# Altium PCB ZD-STM32-ZOUYU.PcbDoc (part 6 of 8)
Units mm, origin at the board's own origin, x right, y up, seen from the top; angles counter-clockwise.
Board outline 251.84 x 139.06 mm, 2 copper layers (Top Layer, Bottom Layer); 254 components, 246 nets, 1172 pads, 599 vias.
Unrouted connection lines stored in the file: 9.
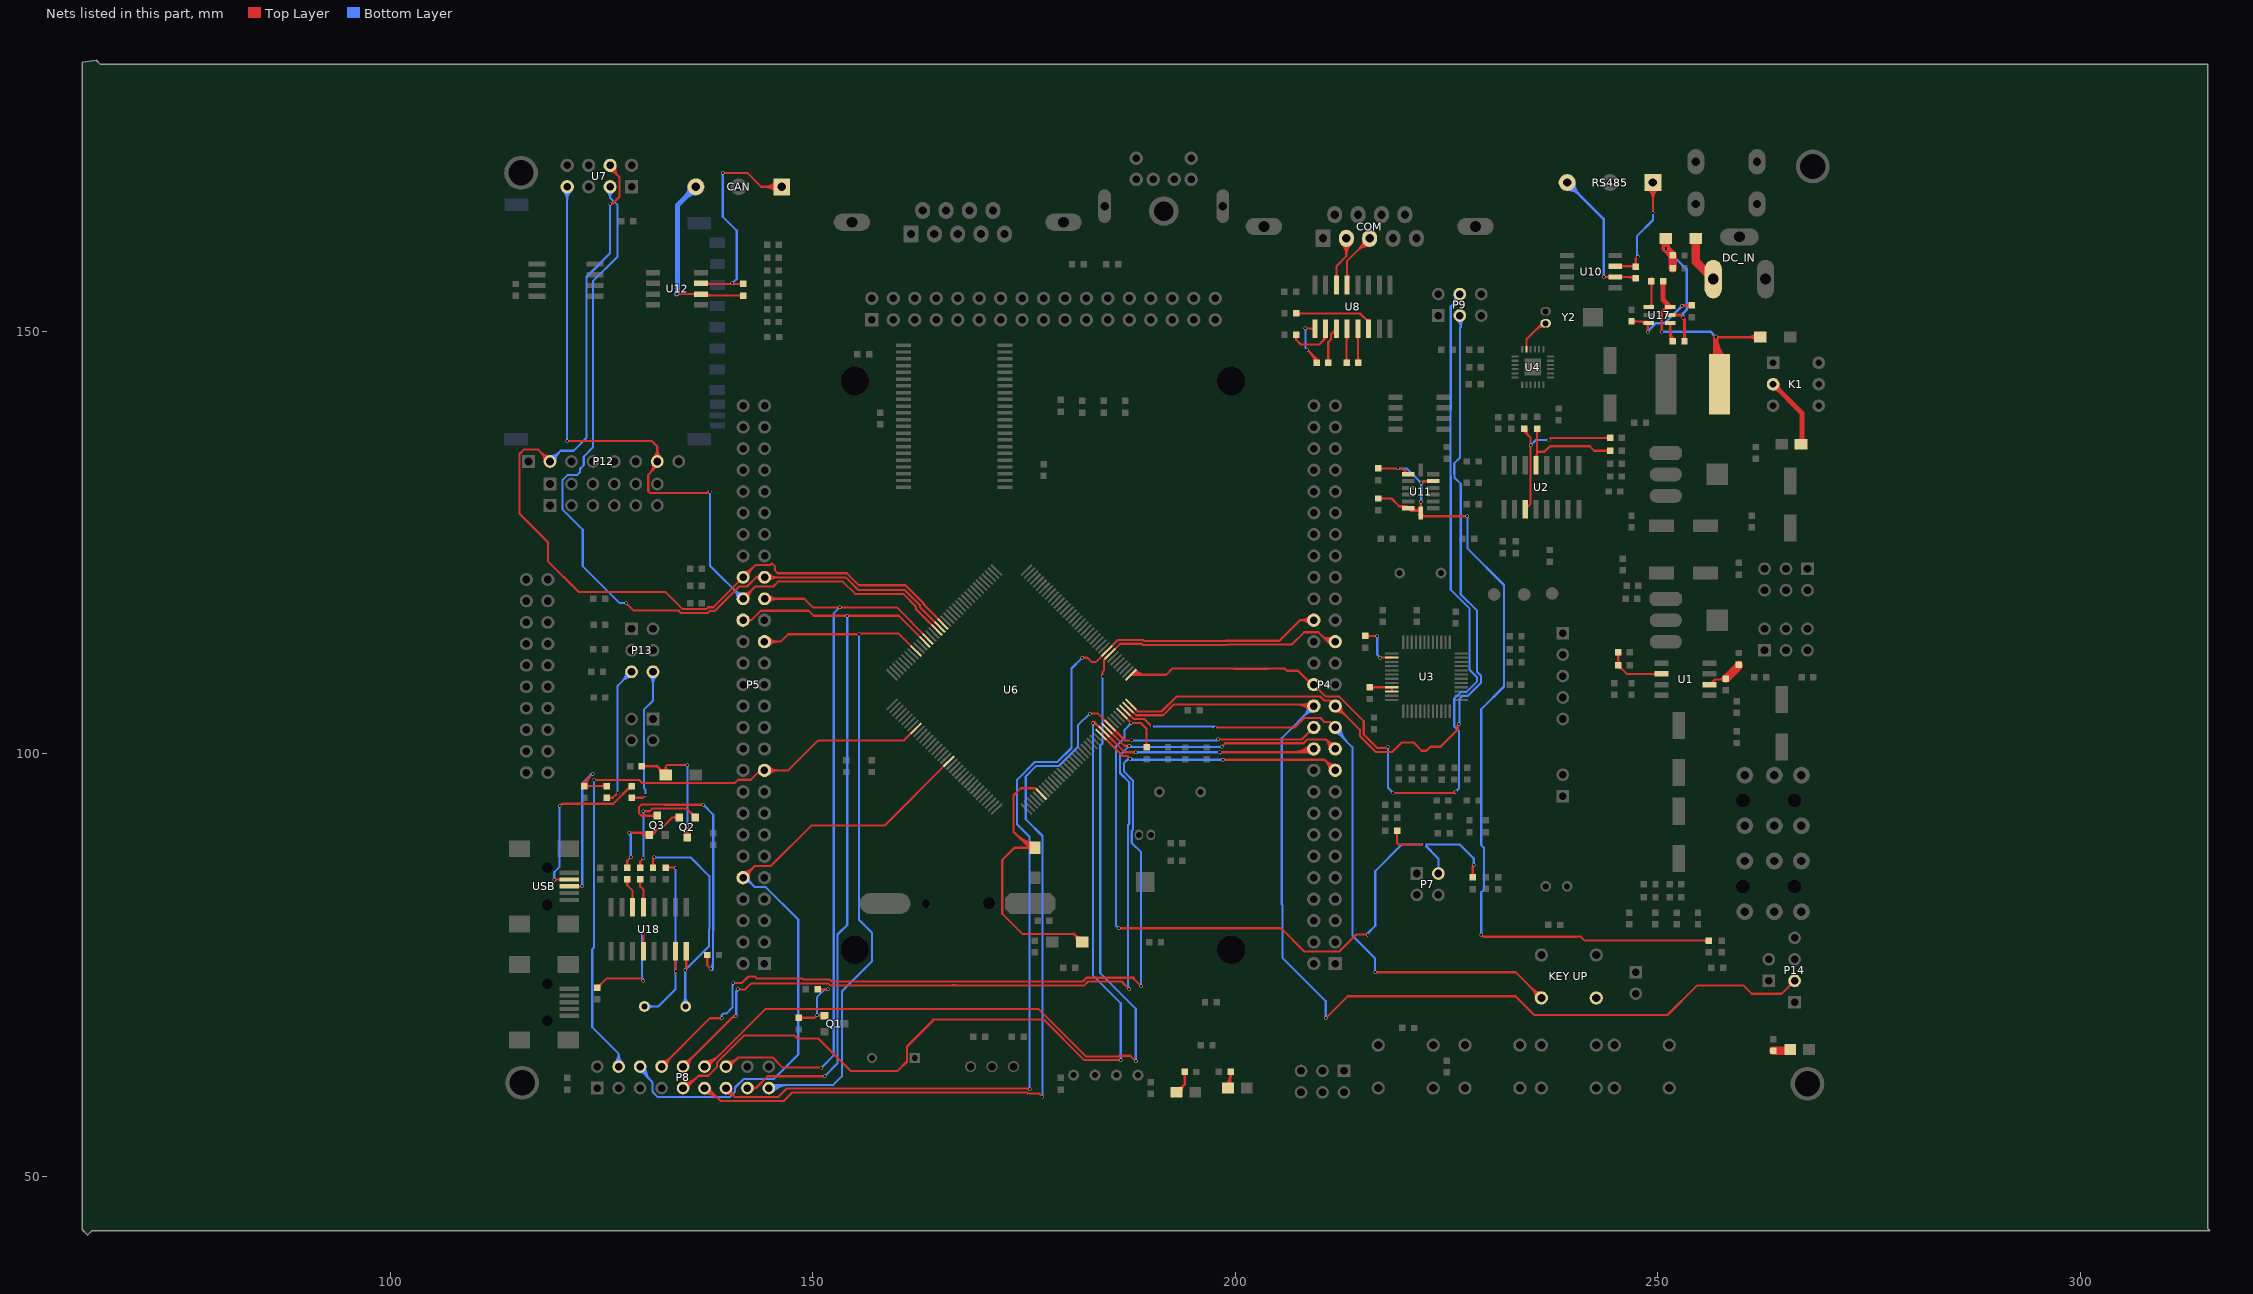
[diagram p6: the nets of this part, all layers, seen from the top]

## Via types
v1: diameter 0.4, hole 0.3, Top Layer to Bottom Layer, 598 vias
v2: diameter 0.3, hole 0.2, Top Layer to Bottom Layer, 1 vias

## Nets (pads, with @x,y where several pads share a name; then routed paths per layer and width w, separated by ;. In a path a pad name is that pad's centre, name@x,y a point inside that pad or via, vN(x,y) a via of type N, cw(c..) or ccw(c..) an arc to the next point about the centre after c; other vN are vias at no path point) (continued)
NetC49_2: C49.2 C50.2 P7.2 R33.1 U6.33 | length 99
  Top Layer w0.254: v1(186.182,79.375) 205.416,79.375 208.171,76.62 212.287,76.62 214.279,78.613 v1(215.646,78.613) ; U6.33@186.58,104.714 U6.33@186.58,104.779 v1(187.692,103.667) 188.814,103.667 189.486,102.995 C50.2@189.486,100.774 ; C50.2@189.306,100.954 ccw(c188.872,101.388) 189.486,101.388 ccw(c190.099,101.388) C50.2@189.665,100.954 ; C49.2@218.959,90.751 cw(c218.525,90.317) 219.138,90.317 cw(c219.752,90.317) C49.2@219.318,90.751 ; C49.2@219.138,90.93 219.138,89.471 219.329,89.281 v1(222.377,89.281) ; R33.1@227.912,85.574 ccw(c227.479,86.008) 228.092,86.008 ccw(c228.705,86.008) R33.1@228.272,85.574 ; R33.1@228.092,85.395 228.092,86.741 v1(228.219,86.868) ; 228.092,86.385 cw(c228.702,86.385) v1@228.271,86.816
  Bottom Layer w0.254: v1(186.182,79.375) 185.89,79.667 185.89,100.92 186.89,101.92 186.89,102.865 v1(187.692,103.667) ; v1(215.646,78.613) 215.646,78.74 216.554,79.648 216.554,86.125 219.71,89.281 v1(222.377,89.281) ; v1@215.719,78.613 cw(c216.202,78.613) 215.86,78.954 ; P7.2@224.028,85.852 224.028,87.63 v1(222.377,89.281) ; v1(228.219,86.868) 228.219,87.63 226.568,89.281 v1(222.377,89.281)
NetC65_1: C65.1 U8.3 | length 6.2
  Top Layer w0.254: C65.1@210.818,146.484 ccw(c210.385,146.917) 210.998,146.917 ccw(c211.611,146.917) C65.1@211.177,146.484 ; C65.1@210.998,146.304 210.998,148.75 211.32,149.073 211.32,149.665 U8.3@211.963,150.308 ; 211.362,149.707 cw(c211.804,149.265) U8.3@212.146,149.788
NetC65_2: C65.2 U8.1 | length 9
  Top Layer w0.254: v1(208.28,150.368) 209.363,150.368 U8.1@209.423,150.308 ; v1(208.534,147.828) 209.613,146.749 ; 208.861,150.368 cw(c208.861,149.746) U8.1@209.301,150.186 ; 208.867,147.495 cw(c207.677,146.306) C65.2@209.359,146.306 ; 209.3,147.062 cw(c208.544,146.306) C65.2@209.613,146.306 209.613,146.749 ; C65.2@209.485,146.525 ccw(c209.354,146.748) 209.613,146.748 ; C65.2@209.742,146.525 cw(c209.873,146.748) 209.613,146.748
  Bottom Layer w0.254: v1(208.28,150.368) 208.28,148.082 v1(208.534,147.828)
NetC66_2: C66.2 U8.2 | length 7.8
  Top Layer w0.254: C66.2@207.031,149.415 cw(c206.688,149.035) 207.201,149.035 ; C66.2@207.201,149.604 207.201,149.034 ; C66.2@207.37,149.415 ccw(c207.713,149.035) 207.201,149.035 ; 210.198,148.73 ccw(c209.419,149.508) U8.2@210.52,149.508 ; 210.631,149.163 ccw(c210.286,149.508) U8.2@210.774,149.508 ; U8.2@210.693,150.308 210.693,149.225 209.931,148.463 207.772,148.463 207.201,149.034
NetC67_1: C67.1 U8.5 | length 5.6
  Top Layer w0.254: C67.1@214.374,146.484 ccw(c214.063,146.795) 214.503,146.795 ; U8.5@214.381,149.386 cw(c214.085,149.09) 214.503,149.09 cw(c214.921,149.09) U8.5@214.625,149.386 ; 214.503,147.04 ccw(c215.29,147.04) C67.1@214.733,146.484 ; U8.5@214.503,150.308 214.503,146.355 C67.1@214.554,146.304
NetC67_2: C67.2 U8.4 | length 5.5
  Top Layer w0.254: C67.2@212.99,146.485 ccw(c212.556,146.919) 213.169,146.919 ccw(c213.783,146.919) C67.2@213.349,146.485 ; C67.2@213.169,146.306 213.169,150.245 U8.4@213.233,150.308 ; 213.169,148.937 cw(c213.804,148.937) U8.4@213.355,149.386
NetC69_2: C69.2 U8.6 | length 11.4
  Top Layer w0.254: C69.2@207.201,152.144 214.755,152.144 215.773,151.127 U8.6@215.773,150.308 ; C69.2@207.38,151.965 cw(c207.814,151.531) 207.814,152.144 cw(c207.814,152.758) C69.2@207.38,152.324 ; 215.464,151.435 cw(c215.137,151.108) U8.6@215.6,151.108 ; U8.6@215.51,151.39 ccw(c215.773,151.653) U8.6@215.773,151.281
NetC74_2: C74.2 C75.2 R47.1 U11.1 U11.6 U11.7 U11.12 | length 114.5
  Top Layer w0.254: C75.2@216.918,130.238 218.475,130.238 219.395,129.319 ; C74.2@216.918,133.794 v1(219.202,133.794) 219.773,133.794 U11.1@220.472,133.096 ; C75.2@217.097,130.059 cw(c217.531,129.625) 217.531,130.238 cw(c217.531,130.852) C75.2@217.097,130.418 ; C74.2@217.097,133.615 cw(c217.531,133.181) 217.531,133.794 cw(c217.531,134.408) C74.2@217.097,133.974 ; U11.6@219.819,129.319 cw(c219.819,129.014) U11.6@220.088,129.158 ; U11.6@219.864,129.038 ccw(c219.395,128.788) 219.395,129.319 ; 219.896,133.672 cw(c219.386,133.163) U11.1@220.102,133.081 ; U11.6@220.242,129.319 cw(c220.242,129.24) U11.6@220.312,129.277 ; U11.1@220.268,133.3 cw(c220.055,133.087) U11.1@220.355,133.052 ; U11.6@220.629,128.921 ccw(c220.863,129.04) 220.863,128.778 ; U11.6@220.855,129.037 ccw(c221.277,129.251) 221.277,128.778 ; 221.054,128.778 ccw(c221.054,129.915) 221.858,129.111 ccw(c221.648,129.321) 221.945,129.321 ccw(c222.242,129.321) U11.7@222.032,129.111 ; U11.6@221.082,129.152 ccw(c221.691,129.462) 221.691,128.778 ; 221.668,128.778 ccw(c221.668,129.302) U11.7@222.038,128.931 ; U11.7@221.708,128.327 cw(c221.923,128.052) U11.7@222.17,128.299 ; U11.7@221.865,128.127 cw(c222.101,127.824) 222.373,128.096 ; v1(221.945,129.87) U11.7@221.945,128.524 ; v1(221.996,132.08) 222.212,132.296 U11.12@223.426,132.296 ; v1@222.048,132.028 cw(c222.694,131.382) U11.12@222.694,132.296 ; U11.12@222.839,132.209 ccw(c222.629,131.999) 222.629,132.296 ccw(c222.629,132.593) U11.12@222.839,132.383 ; v1(227.457,128.143) 222.326,128.143 U11.7@221.945,128.524 ; v1(229.108,78.613) 229.362,78.359 240.428,78.359 240.447,78.378 240.883,78.378 241.359,77.902 R47.1@256.032,77.902 ; R47.1@255.852,77.722 ccw(c255.419,77.289) 255.419,77.902 ccw(c255.419,78.515) R47.1@255.852,78.081 ; 219.395,129.319 220.249,129.319 U11.6@220.472,129.096 220.79,128.778 221.691,128.778 ; 221.691,128.778 U11.7@221.945,128.524
  Bottom Layer w0.254: v1(219.202,133.794) 220.281,133.794 v1(221.996,132.08) 221.996,129.921 v1(221.945,129.87) ; v1@221.894,129.922 ccw(c221.646,130.169) 221.996,130.169 ; v1(227.457,128.143) 227.457,124.333 231.794,119.996 231.794,107.986 229.108,105.3 229.108,89.208 229.446,88.87 229.446,83.977 229.108,83.639 v1(229.108,78.613)
NetC81_1: C81.1 U17.1 | length 5.8
  Top Layer w0.254: U17.1@248.92,152.908 249.25,153.238 ; C81.1@249.071,155.776 cw(c248.637,155.343) 249.25,155.343 cw(c249.863,155.343) C81.1@249.43,155.776 ; C81.1@249.116,156.172 ccw(c248.966,156.413) 249.25,156.413 ; 249.25,153.337 ccw(c249.73,153.337) U17.1@249.391,152.998 ; U17.1@249.371,153.014 cw(c249.519,153.238) 249.25,153.238 ; C81.1@249.384,156.172 cw(c249.535,156.413) 249.25,156.413 ; 249.25,153.238 C81.1@249.25,155.956 249.25,156.413
NetC81_2: C81.2 D3.2 L1.2 U17.6 | length 35.4
  Top Layer w0.3: v1(250.444,149.987) 250.475,150.018 250.475,152.357 251.026,152.908 U17.6@251.46,152.908 ; 250.811,152.693 cw(c251.079,152.425) U17.6@251.079,152.804 ; v1(256.858,149.354) 256.859,149.352 D3.2@262.128,149.352 ; D3.2@261.674,148.998 ccw(c260.821,148.145) 260.821,149.352 ccw(c260.821,150.559) D3.2@261.674,149.706
  Top Layer w0.6: C81.2@250.635,155.954 250.635,153.733 U17.6@251.46,152.908 ; 250.888,153.48 cw(c250.316,152.908) U17.6@251.125,152.908 ; 256.858,147.96 ccw(c259.049,147.96) L1.2@257.543,146.368 ; 256.898,147.47 cw(c256.248,146.821) L1.2@257.011,146.309 ; L1.2@257.302,143.764 257.302,147.066 256.858,147.511 ; L1.2@257.303,147.064 cw(c257.304,147.51) 256.858,147.51 ; L1.2@257.955,146.804 cw(c260.367,149.353) v1(256.858,149.354) 256.858,147.511 ; L1.2@256.63,146.786 ccw(c256.082,147.334) 256.858,147.334 cw(c256.082,147.334) L1.2@256.63,146.786
  Bottom Layer w0.3: v1(250.444,149.987) 256.224,149.987 v1(256.858,149.354)
NetC89_2: C89.2 C90.2 D4.2 R66.1 U17.5 | length 19.3
  Top Layer w0.3: U17.5@251.46,151.958 252.664,151.958 v1(252.984,151.638) 253.162,151.46 R66.1@253.162,148.844 ; v1@252.949,151.603 cw(c252.434,151.088) 253.162,151.088 ; R66.1@252.998,149.007 ccw(c252.604,149.402) 253.162,149.402 ccw(c253.719,149.402) R66.1@253.325,149.007
  Top Layer w1: D4.2@250.952,161.036 v1(250.952,159.831) C90.2@251.778,159.006 C89.2@251.778,157.482
  Bottom Layer w0.3: v1(250.952,159.831) 253.407,157.376 253.407,152.569 252.984,152.146 v1(252.984,151.638)
NetC96_2: C96.2 U18.4 | length 16.5
  Top Layer w0.254: C96.2@124.462,72.326 125.541,73.406 129.667,73.406 v1(129.921,73.152) ; C96.2@124.462,72.581 ccw(c124.462,73.194) 124.895,72.76 ccw(c125.329,72.326) C96.2@124.716,72.326 ; U18.4@129.799,77.57 ccw(c129.503,77.866) 129.921,77.866 ccw(c130.339,77.866) U18.4@130.043,77.57 ; U18.4@129.921,76.648 v1(129.921,78.74)
  Bottom Layer w0.254: 129.775,73.681 ccw(c130.45,73.681) v1@129.973,73.204 ; 129.775,78.211 cw(c130.45,78.211) v1@129.973,78.688 ; v1(129.921,73.152) 129.775,73.298 129.775,78.594 v1(129.921,78.74)
NetC98_2: C98.2 U18.7 Y5.1 | length 26.3
  Top Layer w0.254: C98.2@132.59,86.55 133.667,86.55 v1(133.731,86.487) ; C98.2@132.769,86.371 cw(c133.203,85.937) 133.203,86.55 cw(c133.203,87.164) C98.2@132.769,86.73 ; 133.401,86.55 cw(c133.401,86.157) v1@133.679,86.435 ; U18.7@133.609,75.726 cw(c133.313,75.43) 133.731,75.43 cw(c134.149,75.43) U18.7@133.853,75.726 ; v1(133.731,74.295) U18.7@133.731,76.648
  Bottom Layer w0.254: Y5.1@130.048,70.104 131.699,70.104 133.731,72.136 v1(133.731,74.295) v1(133.731,86.487) ; Y5.1@130.407,69.745 cw(c131.274,68.878) 131.274,70.104 cw(c131.274,71.33) Y5.1@130.407,70.463
NetC99_2: C99.2 U18.8 Y5.2 | length 32.8
  Top Layer w0.254: C99.2@130.886,86.73 ccw(c130.452,87.164) 131.066,87.164 ccw(c131.679,87.164) C99.2@131.245,86.73 ; C99.2@131.066,86.55 131.066,87.632 v1(131.191,87.757) ; 131.066,87.278 cw(c131.67,87.278) v1@131.243,87.705 ; v1@134.822,74.474 ccw(c134.391,74.905) 135.001,74.905 ; v1(134.874,74.422) 135.001,74.549 U18.8@135.001,76.648 ; U18.8@134.879,75.726 cw(c134.583,75.43) 135.001,75.43 cw(c135.419,75.43) U18.8@135.123,75.726
  Bottom Layer w0.254: v1(131.191,87.757) 135.509,87.757 137.741,85.525 137.741,79.314 137.687,79.26 137.687,77.235 v1(134.874,74.422) 134.874,70.158 Y5.2@134.928,70.104 ; Y5.2@134.569,70.463 ccw(c133.832,71.2) 134.874,71.2 ; 134.874,70.848 ccw(c135.672,70.848) Y5.2@135.108,70.284 ; 134.874,71.461 ccw(c136.285,71.461) Y5.2@135.287,70.463
NetCAN_1: CAN.1 R48.2 U12.7 | length 34.9
  Top Layer w0.254: U12.7@136.256,155.702 136.319,155.638 140.081,155.638 R48.2@141.734,155.638 ; U12.7@137.407,155.837 ccw(c137.885,156.315) 137.885,155.638 ; v1(139.319,168.783) 142.227,168.783 143.878,167.132 CAN.1@146.304,167.132 ; 140.132,155.638 ccw(c140.132,156.032) v1@140.41,155.754 ; v1@140.514,155.754 ccw(c140.792,156.032) 140.792,155.638 ; R48.2@141.554,155.459 ccw(c141.12,155.025) 141.12,155.638 ccw(c141.12,156.252) R48.2@141.554,155.818 ; CAN.1@145.687,166.515 ccw(c144.196,165.024) 144.196,167.132 ccw(c144.196,169.24) CAN.1@145.687,167.749 ; CAN.1@145.866,166.694 ccw(c144.81,165.638) 144.81,167.132 ccw(c144.81,168.626) CAN.1@145.866,167.57
  Bottom Layer w0.254: v1(139.319,168.783) 139.319,163.576 140.97,161.925 140.97,156.21 v1(140.462,155.702)
NetCAN_3: CAN.3 R48.1 U12.6 | length 27.1
  Top Layer w0.254: v1(133.858,154.432) 136.256,154.432 136.434,154.254 R48.1@141.732,154.254 ; U12.6@136.121,154.297 ccw(c135.796,153.972) 135.796,154.432 ccw(c135.796,154.892) U12.6@136.121,154.567 ; U12.6@137.227,154.387 ccw(c137.548,154.708) U12.6@137.548,154.254 ; U12.6@137.407,154.567 ccw(c138.161,155.321) 138.161,154.254 ; R48.1@141.552,154.075 ccw(c141.119,153.641) 141.119,154.254 ccw(c141.119,154.867) R48.1@141.552,154.434
  Bottom Layer w0.6: v1(133.858,154.432) 133.964,154.538 133.964,164.952 CAN.3@136.144,167.132 ; CAN.3@135.444,167.132 cw(c133.754,167.132) 134.949,165.937 cw(c136.144,164.742) CAN.3@136.144,166.432
NetCOM_2: COM.2 U8.14 | length 11.5
  Top Layer w0.254: U8.14@211.841,156.43 ccw(c211.545,156.726) 211.963,156.726 ccw(c212.381,156.726) U8.14@212.085,156.43 ; U8.14@211.963,155.508 211.963,157.741 213.131,158.909 COM.2@213.131,161.036 ; COM.2@212.593,160.37 cw(c211.292,159.069) 213.131,159.069 cw(c214.971,159.069) COM.2@213.67,160.37 ; COM.2@212.772,160.55 cw(c211.905,159.683) 213.131,159.683 cw(c214.358,159.683) COM.2@213.491,160.55
NetCOM_3: COM.3 U8.13 | length 12.1
  Top Layer w0.254: U8.13@213.111,156.43 ccw(c212.815,156.726) 213.233,156.726 ccw(c213.651,156.726) U8.13@213.355,156.43 ; U8.13@213.233,155.508 213.233,158.369 COM.3@215.9,161.036 ; 214.382,159.518 cw(c215.9,158.001) COM.3@215.9,160.147 ; 214.689,159.825 ccw(c213.605,160.909) COM.3@215.138,160.909 ; 214.816,159.952 cw(c215.9,158.868) COM.3@215.9,160.401 ; 215.123,160.259 ccw(c214.472,160.909) COM.3@215.392,160.909
NetD1_2: D1.2 D2.2 U6.6 | length 44.5
  Top Layer w0.254: 174.128,90.413 ccw(c176.276,92.56) D2.2@176.276,89.523 ; 174.562,89.979 ccw(c176.276,91.693) D2.2@176.276,89.269 ; 174.996,89.545 ccw(c176.276,90.826) D2.2@176.276,89.015 ; 175.429,89.112 ccw(c176.276,89.958) D2.2@176.276,88.761 ; D2.2@175.906,88.53 ccw(c175.013,87.637) 175.013,88.9 ccw(c175.013,90.163) D2.2@175.906,89.27 ; U6.6@177.034,95.233 176.334,95.933 174.577,95.933 173.736,95.091 173.736,90.805 175.641,88.9 D2.2@176.276,88.9 173.863,88.9 172.407,87.444 172.407,81.085 174.791,78.701 180.887,78.701 D1.2@181.864,77.724 ; 180.837,78.751 cw(c179.86,77.774) D1.2@181.241,77.738 ; 181.042,78.546 ccw(c181.764,79.268) D1.2@181.764,78.247 ; D1.2@181.255,78.333 cw(c180.675,77.753) D1.2@181.495,77.731
NetD4_1: D4.1 DC_IN.1 | length 5.7
  Top Layer w1: D4.1@254.508,161.036 254.508,158.265 DC_IN.1@256.563,156.21
NetD7_2: D7.2 Q2.3 R68.2 | length 21.7
  Top Layer w0.254: R68.2@129.731,98.55 131.574,98.55 D7.2@132.588,97.536 132.588,98.552 ; R68.2@129.91,98.371 cw(c130.344,97.937) 130.344,98.55 cw(c130.344,99.164) R68.2@129.91,98.73 ; 131.524,98.6 cw(c130.461,97.536) D7.2@131.965,97.536 ; 131.766,98.358 ccw(c132.488,99.08) D7.2@132.488,98.059 ; D7.2@131.958,98.166 cw(c131.328,97.536) D7.2@132.219,97.536 ; D7.2@132.284,97.962 ccw(c131.863,98.552) 132.588,98.552 ; D7.2@132.892,97.962 cw(c133.313,98.552) 132.588,98.552 ; Q2.3@134.9,90.391 ccw(c134.348,90.943) 135.128,90.943 ccw(c135.908,90.943) Q2.3@135.356,90.391 ; Q2.3@135.128,90.138 v1(135.128,91.44) ; v1(135.128,98.679) 132.715,98.679 132.588,98.552
  Bottom Layer w0.254: v1(135.128,91.44) v1(135.128,98.679)
NetDS0_1: DS0.1 R43.1 | length 6.3
  Top Layer w0.254: DS0.1@193.041,59.942 194.005,60.907 ; DS0.1@193.106,60.45 ccw(c193.106,61.52) 193.862,60.764 ; DS0.1@193.36,59.945 cw(c194.105,59.953) DS0.1@193.578,60.479 ; DS0.1@193.614,59.948 cw(c194.95,59.962) 194.005,60.907 ; R43.1@193.826,62.177 cw(c193.392,61.744) 194.005,61.744 cw(c194.618,61.744) R43.1@194.185,62.177 ; R43.1@194.005,62.357 194.005,60.907
NetDS1_1: DS1.1 R44.1 | length 6.6
  Top Layer w0.254: DS1.1@198.843,60.81 ccw(c197.398,62.254) R44.1@199.441,62.254 ; DS1.1@199.022,60.63 ccw(c198.012,61.641) 199.441,61.641 ; DS1.1@199.137,59.942 199.441,60.246 R44.1@199.441,62.357 ; R44.1@199.261,62.177 cw(c198.828,61.744) 199.441,61.744 cw(c200.054,61.744) R44.1@199.62,62.177 ; 199.441,61.1 ccw(c199.851,61.1) DS1.1@199.561,60.81
NetF1_2: F1.2 K1.2 | length 11.6
  Top Layer w0.6: K1.2@263.652,143.314 cw(c263.652,142.228) 264.42,142.996 cw(c265.188,143.764) K1.2@264.102,143.764 ; K1.2@263.652,143.764 267.081,140.335 267.081,136.652 F1.2@266.954,136.652 ; F1.2@266.844,136.889 ccw(c266.272,137.461) 267.081,137.461 ccw(c267.89,137.461) F1.2@267.318,136.889
NetP13_5: P13.5 R55.1 | length 21.3
  Top Layer w0.254: R55.1@125.603,94.818 126.314,94.818 v1(126.873,95.377) ; R55.1@125.783,94.639 cw(c126.216,94.205) 126.216,94.818 cw(c126.216,95.431) R55.1@125.783,94.998
  Bottom Layer w0.254: v1(126.873,95.377) 126.873,108.077 P13.5@128.524,109.728 ; P13.5@127.901,109.728 cw(c126.397,109.728) 127.46,108.664 cw(c128.524,107.601) P13.5@128.524,109.105 ; P13.5@128.155,109.728 cw(c127.264,109.728) 127.894,109.098 cw(c128.524,108.468) P13.5@128.524,109.359
NetP13_6: P13.6 R54.1 | length 21.6
  Top Layer w0.254: R54.1@128.524,94.818 129.87,94.818 v1(130.175,95.123) ; R54.1@128.704,94.639 cw(c129.137,94.205) 129.137,94.818 cw(c129.137,95.431) R54.1@128.704,94.998
  Bottom Layer w0.254: v1(130.175,95.123) 130.175,95.758 129.987,95.946 129.987,105.217 131.064,106.294 P13.6@131.064,109.728 ; P13.6@130.623,109.287 cw(c129.56,108.224) 131.064,108.224 cw(c132.568,108.224) P13.6@131.505,109.287 ; P13.6@130.803,109.467 cw(c130.173,108.837) 131.064,108.837 cw(c131.955,108.837) P13.6@131.325,109.467
NetQ1_2: Q1.2 R58.1 R60.2 | length 11.2
  Top Layer w0.254: R60.2@148.338,68.77 150.177,68.77 v1(150.495,69.088) ; R60.2@148.517,68.591 cw(c148.951,68.157) 148.951,68.77 cw(c148.951,69.384) R60.2@148.517,68.95 ; R58.1@150.546,72.136 v1(151.765,72.136) ; 150.707,69.088 ccw(c150.707,69.642) Q1.2@151.099,69.25 ; R58.1@150.725,71.956 cw(c151.159,71.523) 151.159,72.136 cw(c151.159,72.749) R58.1@150.725,72.316 ; Q1.2@151.079,68.815 ccw(c150.495,68.327) v1(150.495,69.088) ; Q1.2@151.352,69.022 151.286,69.088 v1(150.495,69.088)
  Bottom Layer w0.254: v1(150.495,69.088) 150.495,71.247 151.384,72.136 v1(151.765,72.136)
NetQ2_1: Q2.1 Q3.2 R70.2 | length 18.3
  Top Layer w0.254: R70.2@127.838,86.73 ccw(c127.404,87.164) 128.018,87.164 ccw(c128.631,87.164) R70.2@128.197,86.73 ; R70.2@128.018,86.55 128.018,87.378 v1(128.43,87.79) v1@128.524,87.884 ; v1(128.27,90.678) 130.336,90.678 Q3.2@130.622,90.392 130.943,90.392 131.745,91.194 ; 129.212,90.678 cw(c129.212,89.007) Q3.2@130.394,90.189 ; 129.825,90.678 cw(c129.825,89.62) Q3.2@130.573,90.368 ; Q3.2@130.623,90.486 ccw(c130.637,91.452) 131.32,90.769 ; Q3.2@130.627,90.74 ccw(c130.649,92.29) 131.745,91.194 ; Q2.1@133.95,92.26 ccw(c133.398,91.708) 133.398,92.488 ccw(c133.398,93.268) Q2.1@133.95,92.716 ; Q2.1@134.178,92.488 133.382,92.488 132.088,91.194 131.745,91.194
  Bottom Layer w0.254: v1@128.218,90.626 cw(c127.708,90.116) 128.43,90.116 ; v1(128.27,90.678) 128.43,90.518 v1(128.43,87.79)
NetQ2_2: Q2.2 R69.2 | length 15.7
  Top Layer w0.254: R69.2@129.362,86.73 ccw(c128.928,87.164) 129.542,87.164 ccw(c130.155,87.164) R69.2@129.721,86.73 ; R69.2@129.542,86.55 129.542,87.251 v1(129.921,87.63) ; v1(129.921,93.218) 130.661,93.218 130.987,93.544 132.157,93.544 132.175,93.526 135.04,93.526 Q2.2@136.078,92.488 ; 135.484,93.082 ccw(c136.078,93.676) Q2.2@136.078,92.836 ; 135.544,93.022 cw(c135.036,92.513) Q2.2@135.755,92.513
  Bottom Layer w0.254: v1(129.921,87.63) v1(129.921,93.218)
NetQ3_3: Q3.3 R71.1 | length 35.8
  Top Layer w0.254: 130.729,92.691 ccw(c130.729,93.56) Q3.3@131.344,92.945 ; 130.855,92.691 cw(c130.855,92) Q3.3@131.344,92.489 ; Q3.3@131.572,92.742 131.521,92.691 129.703,92.691 129.394,93 129.394,93.707 129.685,93.998 132.345,93.998 132.364,93.98 v1(137.033,93.98) ; R71.1@137.311,76.02 cw(c136.877,75.587) 137.49,75.587 cw(c138.103,75.587) R71.1@137.67,76.02 ; R71.1@137.49,76.2 137.49,74.981 v1(137.922,74.549)
  Bottom Layer w0.254: v1(137.033,93.98) 138.195,92.818 138.195,79.126 138.157,79.088 138.157,74.568 138.176,74.549 ; v1@137.87,74.601 ccw(c137.178,75.293) 138.157,75.293 ; v1@138.05,74.421 ccw(c137.792,74.679) 138.157,74.679
NetR1_1: R1.1 R2.2 U1.2 | length 10.7
  Top Layer w0.254: R2.2@245.121,110.671 ccw(c244.657,111.135) 245.313,111.135 ; R1.1@245.134,111.834 cw(c244.7,111.401) 245.313,111.401 cw(c245.926,111.401) R1.1@245.493,111.834 ; R2.2@245.3,110.238 cw(c245.3,109.624) 245.734,110.058 cw(c246.168,110.492) R2.2@245.554,110.492 ; 245.313,111.074 ccw(c245.883,111.074) R2.2@245.48,110.671 ; R1.1@245.313,112.014 245.313,110.504 R2.2@245.3,110.492 246.318,109.474 U1.2@250.444,109.474 ; U1.2@249.801,109.339 ccw(c249.476,109.014) 249.476,109.474 ccw(c249.476,109.934) U1.2@249.801,109.609
NetR4_1: R4.1 R5.2 U1.6 | length 5.5
  Top Layer w0.254: U1.6@256.144,108.204 256.769,108.83 257.993,108.83 R5.2@258.066,108.902 ; 257.276,108.83 ccw(c257.276,109.692) R5.2@257.886,109.082 ; 257.629,108.83 cw(c257.629,108.466) R5.2@257.886,108.723
  Top Layer w1: R5.2@258.066,108.902 259.588,110.425 R4.1@259.588,110.566
NetR17_1: R17.1 U3.26 | length 6.8
  Top Layer w0.254: R17.1@215.392,113.97 216.738,113.97 v1(216.789,113.919) ; R17.1@215.572,113.79 cw(c216.005,113.357) 216.005,113.97 cw(c216.005,114.583) R17.1@215.572,114.149 ; 216.49,113.97 cw(c216.49,113.62) v1@216.737,113.867 ; v1@217.043,111.379 217.06,111.396 v1(217.17,111.396) U3.26@218.527,111.396
  Bottom Layer w0.254: v1(216.789,113.919) 216.789,111.777 v1(217.17,111.396)
NetR20_2: R20.2 U3.33 U3.34 | length 4.1
  Top Layer w0.254: R20.2@215.902,107.886 215.911,107.896 U3.33@218.527,107.896 U3.34@218.527,107.396 ; R20.2@216.081,107.707 cw(c216.538,107.25) 216.538,107.896 ; R20.2@216.081,108.066 ccw(c216.492,108.477) 216.492,107.896
NetR45_1: R45.1 RS485.3 U10.6 | length 25
  Top Layer w0.254: v1(243.586,156.464) U10.6@244.968,156.464 247.218,156.464 R45.1@247.396,156.286 ccw(c246.967,155.857) 246.967,156.464 ; U10.6@244.325,156.329 ccw(c244,156.004) 244,156.464 ccw(c244,156.924) U10.6@244.325,156.599 ; U10.6@245.611,156.329 cw(c245.936,156.004) 245.936,156.464 cw(c245.936,156.924) U10.6@245.611,156.599 ; 246.354,156.464 cw(c246.354,155.244) R45.1@247.216,156.107
  Bottom Layer w0.3: RS485.3@239.268,166.79 cw(c239.268,164.738) 240.719,166.189 cw(c242.17,167.64) RS485.3@240.118,167.64 ; RS485.3@239.268,167.09 cw(c239.268,165.762) 240.207,166.701 cw(c241.146,167.64) RS485.3@239.818,167.64 ; RS485.3@239.268,167.64 243.586,163.322 v1(243.586,156.464)
NetR45_2: R45.2 RS485.1 U10.7 | length 22.2
  Top Layer w0.254: U10.7@244.968,157.734 247.334,157.734 R45.2@247.398,157.671 247.398,158.625 v1(247.65,158.877) ; U10.7@245.611,157.599 cw(c245.936,157.274) 245.936,157.734 cw(c245.936,158.194) U10.7@245.611,157.869 ; 246.631,157.734 cw(c246.631,156.904) R45.2@247.218,157.491 ; 246.938,157.734 ccw(c246.938,158.13) 247.218,157.85 ccw(c246.784,158.284) 247.398,158.284 ccw(c248.011,158.284) R45.2@247.577,157.85 ; RS485.1@248.811,167.023 cw(c247.32,165.532) 249.428,165.532 cw(c251.536,165.532) RS485.1@250.045,167.023 ; RS485.1@248.99,167.202 cw(c247.934,166.146) 249.428,166.146 cw(c250.922,166.146) RS485.1@249.866,167.202 ; v1(249.428,164.084) RS485.1@249.428,167.64
  Bottom Layer w0.254: 247.523,159.36 ccw(c248.133,159.36) v1@247.702,158.929 ; v1(247.65,158.877) 247.523,159.004 247.523,161.29 249.428,163.195 v1(249.428,164.084)
NetR46_1: R46.1 SYS.1 | length 2.8
  Top Layer w1: R46.1@263.652,64.846 265.509,64.846 SYS.1@265.685,65.022 ; 264.869,64.846 ccw(c264.869,65.774) SYS.1@265.524,65.118
NetR54_2: R54.2 USB.2 | length 21.9
  Top Layer w0.254: v1(119.38,85.09) 119.418,85.128 USB.2@121.134,85.128 ; v1@119.432,85.038 cw(c119.648,84.822) 119.648,85.128 ; v1(120.015,93.853) 120.272,94.11 126.368,94.11 128.46,96.203 R54.2@128.526,96.203 ; USB.2@120.147,85.041 ccw(c119.937,84.831) 119.937,85.128 ccw(c119.937,85.425) USB.2@120.147,85.215 ; 127.981,95.723 cw(c128.526,95.178) R54.2@128.526,95.948 ; 128.138,95.88 ccw(c127.816,96.203) R54.2@128.272,96.203
  Bottom Layer w0.254: v1(119.38,85.09) 119.38,86.014 120.015,86.649 v1(120.015,93.853)
NetR55_2: R55.2 R56.2 USB.3 | length 25.2
  Top Layer w0.254: USB.3@121.134,84.328 v1(122.682,84.328) ; USB.3@122.121,84.241 cw(c122.331,84.031) 122.331,84.328 cw(c122.331,84.625) USB.3@122.121,84.415 ; R56.2@122.808,96.421 ccw(c122.673,96.649) 122.938,96.649 ; R56.2@123.067,96.421 cw(c123.202,96.649) 122.938,96.649 ; R56.2@123.117,96.023 cw(c123.551,95.589) 123.551,96.203 cw(c123.551,96.816) R56.2@123.117,96.382 ; R56.2@123.192,96.203 cw(c124.882,96.203) 123.687,97.398 ; 123.253,96.964 ccw(c124.015,96.203) R56.2@122.938,96.203 ; v1(123.952,97.663) 122.938,96.649 ; R55.2@125.425,96.023 ccw(c124.991,95.589) 124.991,96.203 ccw(c124.991,96.816) R55.2@125.425,96.382 ; R55.2@125.605,96.203 R56.2@122.938,96.203 ; R56.2@122.938,96.203 122.938,96.649
  Bottom Layer w0.254: v1(122.682,84.328) 122.682,96.52 123.698,97.536 ; 123.611,97.449 cw(c123.952,97.107) v1@123.952,97.59
NetR62_1: 
NetR65_1: R65.1 R67.2 U17.3 | length 13.4
  Top Layer w0.254: R65.1@246.888,151.206 248.722,151.206 U17.3@248.92,151.008 ; R65.1@247.068,151.027 cw(c247.501,150.593) 247.501,151.206 cw(c247.501,151.819) R65.1@247.068,151.386 ; 247.754,151.206 cw(c247.754,150.223) U17.3@248.449,150.918 ; U17.3@248.367,151.206 cw(c248.367,150.836) U17.3@248.629,151.098
  Top Layer w0.3: v1(248.793,149.987) 248.793,150.881 U17.3@248.92,151.008 ; 248.793,150.45 cw(c249.478,150.45) U17.3@248.994,150.934 ; v1(252.857,153.035) 252.92,153.099 R67.2@254.002,153.099 ; v1@252.892,153 cw(c253.131,152.761) 253.131,153.099 ; R67.2@253.838,152.935 ccw(c253.444,152.541) 253.444,153.099 ccw(c253.444,153.656) R67.2@253.838,153.262
  Bottom Layer w0.3: v1(248.793,149.987) 249.809,151.003 250.825,151.003 v1(252.857,153.035)
NetR66_2: R66.2 U17.4 | length 4.3
  Top Layer w0.3: 251.46,149.446 ccw(c252.377,149.446) R66.2@251.729,148.797 ; 251.46,150.17 ccw(c253.102,150.17) R66.2@251.941,149.009 ; U17.4@251.46,151.008 251.46,149.163 R66.2@251.778,148.846
NetR69_1: R69.1 U18.13 | length 5.1
  Top Layer w0.254: R69.1@129.36,84.987 cw(c128.927,84.553) 129.54,84.553 cw(c130.153,84.553) R69.1@129.72,84.987 ; R69.1@129.54,85.166 129.54,84.328 129.921,83.947 U18.13@129.921,81.848 ; U18.13@129.799,82.77 ccw(c129.503,83.066) 129.921,83.066 ccw(c130.339,83.066) U18.13@130.043,82.77
NetR70_1: R70.1 U18.14 | length 5.2
  Top Layer w0.254: R70.1@127.836,84.987 cw(c127.403,84.553) 128.016,84.553 cw(c128.629,84.553) R70.1@128.196,84.987 ; R70.1@128.016,85.166 128.016,84.455 128.651,83.82 U18.14@128.651,81.848 ; U18.14@128.529,82.77 ccw(c128.233,83.066) 128.651,83.066 ccw(c129.069,83.066) U18.14@128.773,82.77
NetU4_11: U4.11 Y2.2 | length 6.2
  Top Layer w0.254: U4.11@234.454,147.897 234.454,149.093 236.338,150.978 Y2.2@236.728,150.978 Y2.2@236.696,150.978 ; 235.502,150.141 cw(c236.601,149.043) Y2.2@236.601,150.597 ; 235.936,150.575 cw(c236.601,149.91) Y2.2@236.601,150.851
"NRF CE": P5.38 P12.2 U6.91 U7.3 | length 127.9
  Top Layer w0.254: P12.2@118.249,134.62 ccw(c116.745,134.62) 117.808,135.684 ccw(c118.872,136.747) P12.2@118.872,135.243 ; P12.2@118.503,134.62 ccw(c117.612,134.62) 118.242,135.25 ccw(c118.872,135.88) P12.2@118.872,134.989 ; P12.2@118.872,134.62 117.475,136.017 115.767,136.017 115.255,135.505 115.255,133.735 115.262,133.728 115.262,128.451 118.618,125.095 118.618,122.809 122.24,119.187 132.527,119.187 134.568,117.146 137.359,117.146 137.58,117.367 138.195,117.367 P5.38@141.732,120.904 143.183,122.355 144.923,122.355 145.123,122.555 145.523,122.155 145.523,121.702 145.832,121.393 154.014,121.393 155.437,119.97 160.951,119.97 163.106,117.815 163.106,117.698 165.366,115.438 U6.91@165.366,115.385 ; v1(125.984,165.1) 126.238,165.1 127.098,165.96 127.098,168.246 125.984,169.361 U7.3@125.984,169.672 ; v1@125.984,165.173 ccw(c125.984,165.962) 126.542,165.404 ; U7.3@125.984,169.012 cw(c125.984,168.169) 126.58,168.765 ; U7.3@126.379,169.578 ccw(c127.265,169.367) 126.621,168.724 ; U7.3@126.626,169.519 ccw(c127.784,169.244) 126.943,168.402 ; P5.38@141.732,121.285 ccw(c141.732,122.205) 142.382,121.554 ccw(c143.033,120.904) P5.38@142.113,120.904 ; P5.38@141.732,121.539 ccw(c141.732,123.072) 142.816,121.988 ccw(c143.9,120.904) P5.38@142.367,120.904
  Bottom Layer w0.254: P12.2@118.872,134.62 120.142,135.89 121.666,135.89 123.19,137.414 123.19,156.464 125.984,159.258 v1(125.984,165.1) ; P12.2@118.872,134.989 ccw(c118.872,135.88) 119.502,135.25 ccw(c120.132,134.62) P12.2@119.241,134.62 ; P12.2@118.872,135.243 ccw(c118.872,136.747) 119.936,135.684 ccw(c120.999,134.62) P12.2@119.495,134.62
"NRF CS": P5.37 U6.92 U7.4 | length 106.3
  Top Layer w0.254: v1(127.889,117.856) 128.778,116.967 134.105,116.967 134.38,116.692 137.547,116.692 137.768,116.913 138.383,116.913 141.285,119.815 142.183,119.815 143.272,120.904 ; P5.37@143.697,120.634 ccw(c143.272,120.434) 143.272,120.904 ; P5.37@143.697,121.174 cw(c143.272,121.374) 143.272,120.904 ; P5.37@144.541,120.635 cw(c145.192,119.984) 145.192,120.904 cw(c145.192,121.824) P5.37@144.541,121.173 ; P5.37@144.721,120.455 cw(c145.805,119.371) 145.805,120.904 cw(c145.805,122.437) P5.37@144.721,121.353 ; U6.92@165.013,115.032 162.652,117.393 162.652,117.627 160.88,119.399 155.366,119.399 153.861,120.904 P5.37@144.272,120.904 143.272,120.904
  Bottom Layer w0.254: U7.4@125.599,166.595 cw(c125.061,165.845) 125.984,165.845 ; U7.4@125.747,166.802 cw(c125.416,166.34) 125.984,166.34 cw(c126.552,166.34) U7.4@126.221,166.802 ; U7.4@125.984,167.132 125.984,165.845 ; U7.4@126.369,166.595 ccw(c126.907,165.845) 125.984,165.845 ; v1(127.889,117.856) 127.132,117.856 122.755,122.233 122.755,126.547 120.335,128.967 120.335,132.399 120.966,133.03 122.096,133.03 122.421,133.355 122.421,133.731 122.875,134.185 122.875,135.194 123.952,136.271 123.952,155.956 126.873,158.877 126.873,164.956 125.984,165.845
"NRF IRQ": P5.36 P12.7 U6.93 U7.8 | length 113.8
  Top Layer w0.254: v1(120.904,137.033) 130.937,137.033 131.572,136.398 P12.7@131.572,134.62 131.572,134.107 130.495,133.03 130.495,131.125 130.744,130.876 137.607,130.876 v1(137.795,131.064) ; 130.752,133.287 ccw(c130.012,134.027) P12.7@130.99,134.399 ; 131.029,133.564 ccw(c130.414,134.179) P12.7@131.227,134.489 ; P12.7@131.131,135.061 ccw(c130.068,136.124) 131.572,136.124 ccw(c133.076,136.124) P12.7@132.013,135.061 ; 131.307,133.842 ccw(c130.816,134.332) P12.7@131.465,134.579 ; P12.7@131.311,134.881 ccw(c130.681,135.511) 131.572,135.511 ccw(c132.463,135.511) P12.7@131.833,134.881 ; 137.165,130.876 ccw(c137.165,131.694) v1@137.743,131.116 ; P5.36@141.732,118.364 143.183,119.815 145.304,119.815 145.885,120.396 153.543,120.396 154.994,118.945 160.692,118.945 162.198,117.439 162.198,117.14 U6.93@164.659,114.678 ; P5.36@141.732,118.745 ccw(c141.732,119.665) 142.382,119.014 ccw(c143.033,118.364) P5.36@142.113,118.364 ; P5.36@141.732,118.999 ccw(c141.732,120.532) 142.816,119.448 ccw(c143.9,118.364) P5.36@142.367,118.364
  Bottom Layer w0.254: U7.8@120.437,166.665 cw(c119.31,165.538) 120.904,165.538 cw(c122.498,165.538) U7.8@121.371,166.665 ; U7.8@120.617,166.845 cw(c119.923,166.151) 120.904,166.151 cw(c121.885,166.151) U7.8@121.191,166.845 ; v1(120.904,137.033) U7.8@120.904,167.132 ; v1@137.795,130.876 137.795,122.301 P5.36@141.732,118.364 ; P5.36@141.097,118.364 ccw(c139.564,118.364) 140.648,119.448 ccw(c141.732,120.532) P5.36@141.732,118.999 ; P5.36@141.351,118.364 ccw(c140.431,118.364) 141.082,119.014 ccw(c141.732,119.665) P5.36@141.732,118.745
OUTL: C2.1 C22.1 U2.3 | length 22.4
  Top Layer w0.254: U2.3@234.315,128.972 234.95,129.607 v1(234.95,136.525) 234.95,137.414 234.188,138.176 C22.1@234.188,138.506 ccw(c234.874,138.462) 234.388,137.976 ; C22.1@234.441,138.49 ccw(c235.62,138.414) 234.785,137.579 ; v1(237.109,137.16) 237.365,137.416 C2.1@244.361,137.416 ; C2.1@244.181,137.236 ccw(c243.747,136.802) 243.747,137.416 ccw(c243.747,138.029) C2.1@244.181,137.595
  Bottom Layer w0.254: v1(234.95,136.525) 235.585,137.16 v1(237.109,137.16)
"OUTL C2": 
OUTR: C4.1 C23.1 U2.13 | length 16.1
  Top Layer w0.254: U2.13@235.463,135.094 ccw(c234.861,135.696) 235.712,135.696 ; C23.1@235.532,138.327 cw(c235.099,137.893) 235.712,137.893 cw(c236.325,137.893) C23.1@235.892,138.327 ; U2.13@235.585,134.172 235.712,134.299 235.712,135.763 ; C23.1@235.712,138.506 235.712,135.763 ; C4.1@244.181,135.712 ccw(c243.747,135.278) 243.747,135.892 ccw(c243.747,136.505) C4.1@244.181,136.071 ; C4.1@244.361,135.892 242.481,135.892 241.956,136.417 237.238,136.417 236.584,135.763 235.712,135.763
"OUTR C4": 
"OV D0": P4.19 P8.8 U6.26 | length 131.2
  Top Layer w0.254: P8.8@132.08,62.992 137.795,68.707 v1(139.192,68.707) ; P8.8@132.08,63.361 ccw(c132.08,64.252) 132.71,63.622 ccw(c133.34,62.992) P8.8@132.449,62.992 ; P8.8@132.08,63.615 ccw(c132.08,65.119) 133.144,64.056 ccw(c134.207,62.992) P8.8@132.703,62.992 ; v1(140.589,72.898) 141.605,72.898 142.367,73.66 143.117,73.66 143.34,73.437 148.707,73.437 148.844,73.3 151.989,73.3 152.228,73.06 166.358,73.06 166.365,73.067 167.137,73.067 167.144,73.06 181.918,73.06 182.372,73.514 187.979,73.514 187.979,73.387 v1(188.849,72.517) ; U6.26@184.105,102.304 186.66,99.749 187.271,99.749 v1(187.579,99.441) ; v1(198.501,99.314) 210.566,99.314 P4.19@211.825,98.055 ; P4.19@211.165,98.055 ccw(c209.57,98.055) 210.698,99.182 ccw(c211.825,100.31) P4.19@211.825,98.715 ; P4.19@211.419,98.055 ccw(c210.438,98.055) 211.131,98.749 ccw(c211.825,99.442) P4.19@211.825,98.461
  Bottom Layer w0.254: v1(139.192,68.707) 139.192,69.093 139.366,69.267 139.742,69.267 140.462,69.987 v1@140.462,72.898 ; 140.462,72.415 cw(c141.072,72.415) v1@140.641,72.846 ; 187.021,99.137 cw(c187.579,98.579) v1@187.579,99.368 ; v1@187.631,99.493 ccw(c188.062,99.924) 188.062,99.314 ; v1(188.849,72.517) 188.849,88.348 187.735,89.462 187.735,90.897 187.887,91.049 187.887,96.847 186.798,97.936 186.798,98.914 187.325,99.441 v1(187.579,99.441) 187.706,99.314 191.897,99.314 v1(198.501,99.314)
"OV D1": P4.22 P8.9 U6.27 | length 143.7
  Top Layer w0.254: P8.9@134.62,60.452 135.006,60.452 136.469,61.915 137.606,61.915 138.623,62.932 138.623,63.438 141.879,66.694 147.788,66.694 148.169,66.313 150.622,66.313 154.451,62.484 160.02,62.484 161.125,63.589 161.125,65.367 164.211,68.453 164.211,68.58 177.285,68.58 182.111,63.754 v1(186.436,63.754) ; P8.9@134.62,60.567 ccw(c134.62,61.777) 135.475,60.921 ; P8.9@134.62,60.821 ccw(c134.62,62.644) 135.909,61.355 ; P8.9@134.62,61.075 ccw(c134.62,63.511) 136.342,61.788 ; P8.9@135.243,60.452 cw(c135.815,60.452) 135.411,60.857 ; v1@183.134,103.559 cw(c183.134,102.538) U6.27@183.856,103.26 ; v1(183.134,103.632) 183.134,103.759 183.357,103.759 U6.27@184.458,102.658 186.913,100.203 v1(188.214,100.203) ; v1@183.134,103.813 cw(c183.134,103.405) 183.422,103.694 ; v1(198.12,100.203) 208.893,100.203 P4.22@209.285,100.595 ; 206.745,100.203 ccw(c206.745,103.135) P4.22@208.818,101.062 ; 207.358,100.203 ccw(c207.358,102.522) P4.22@208.998,100.882 ; 207.971,100.203 ccw(c207.971,101.909) P4.22@209.177,100.703 ; 208.585,100.203 ccw(c208.585,101.295) P4.22@209.357,100.523
  Bottom Layer w0.254: v1@183.134,103.759 v1(183.134,103.632) 183.134,73.787 186.436,70.485 v1(186.436,63.754) ; v1(188.214,100.203) v1(198.12,100.203) v1@198.247,100.076
"OV D2": P4.21 P8.10 U6.28 | length 128.4
  Top Layer w0.254: P8.10@134.62,62.992 140.589,68.961 v1(140.843,68.961) ; P8.10@134.62,63.361 ccw(c134.62,64.252) 135.25,63.622 ccw(c135.88,62.992) P8.10@134.989,62.992 ; P8.10@134.62,63.615 ccw(c134.62,65.119) 135.684,64.056 ccw(c136.747,62.992) P8.10@135.243,62.992 ; 140.285,68.657 cw(c140.843,68.099) v1@140.843,68.888 ; v1@141.17,72.209 v1(141.097,72.136) 141.986,72.136 142.696,72.846 151.801,72.846 152.04,72.606 166.546,72.606 166.553,72.613 166.949,72.613 166.956,72.606 182.106,72.606 182.56,73.06 186.528,73.06 v1(187.452,72.136) ; U6.28@184.812,103.011 186.858,100.965 v1(187.452,100.965) ; v1(198.374,100.838) 198.809,101.273 208.065,101.273 208.502,101.709 210.711,101.709 ; P4.21@211.165,100.6 ccw(c209.615,100.613) 210.711,101.709 ; P4.21@211.419,100.598 ccw(c210.465,100.606) 211.139,101.281 ccw(c211.814,101.955) P4.21@211.822,101.001 ; P4.21@211.82,101.255 cw(c211.807,102.805) 210.711,101.709 ; P4.21@211.825,100.595 210.711,101.709
  Bottom Layer w0.254: v1@140.791,69.013 ccw(c140.491,69.313) 140.916,69.313 ; v1(140.843,68.961) 140.916,69.034 140.916,71.955 v1(141.097,72.136) ; 140.916,71.523 cw(c141.71,71.523) v1@141.149,72.084 ; 187.281,72.726 ccw(c188.042,72.726) v1@187.504,72.188 ; v1(187.452,72.136) 187.281,72.307 187.281,91.574 187.433,91.726 187.433,96.659 186.344,97.748 186.344,99.857 v1(187.452,100.965) 187.579,100.838 v1(198.374,100.838) ; v1@187.504,101.017 ccw(c187.935,101.448) 187.935,100.838
"OV D3": P4.24 P8.11 U6.29 | length 125.8
  Top Layer w0.254: P8.11@137.16,59.829 cw(c137.16,57.393) 138.882,59.116 ; P8.11@137.16,60.083 cw(c137.16,58.26) 138.449,59.549 ; P8.11@137.16,60.337 cw(c137.16,59.127) 138.015,59.983 ; P8.11@137.16,60.452 137.546,60.452 139.077,58.921 146.551,58.921 147.574,59.944 175.277,59.944 175.423,59.798 176.803,59.798 v1(177.165,59.436) ; P8.11@137.783,60.452 ccw(c138.355,60.452) 137.951,60.047 ; v1(182.753,104.775) 183.755,104.775 U6.29@185.165,103.365 186.93,101.6 v1(187.706,101.6) ; v1(197.993,101.727) 207.877,101.727 P4.24@209.285,103.135
  Bottom Layer w0.254: v1(177.165,59.436) 177.165,90.297 175.187,92.275 175.187,97.336 176.438,98.587 179.119,98.587 181.356,100.824 181.356,100.838 181.356,103.378 v1(182.753,104.775) ; v1(187.706,101.6) 197.866,101.6 v1(197.993,101.727) ; 197.51,101.6 ccw(c197.51,102.21) v1@197.941,101.779
"OV D4": P4.31 P8.12 U6.44 | length 145
  Top Layer w0.254: P8.12@137.16,62.992 137.535,62.992 144.342,69.799 169.662,69.799 169.672,69.789 171.196,69.789 171.206,69.799 176.708,69.799 182.299,64.208 186.145,64.208 186.218,64.281 187.56,64.281 v1(188.214,63.627) v1@188.341,63.627 ; P8.12@137.16,63.107 ccw(c137.16,64.29) 137.996,63.453 ; P8.12@137.16,63.361 ccw(c137.16,65.157) 138.43,63.887 ; P8.12@137.16,63.615 ccw(c137.16,66.024) 138.863,64.321 ; P8.12@137.783,62.992 cw(c138.382,62.992) 137.958,63.416 ; v1(184.277,109.22) 184.277,109.728 184.466,109.917 184.466,111.15 U6.44@185.165,111.85 186.367,113.052 188.909,113.052 189.064,112.897 198.975,112.897 199.029,112.951 206.677,112.951 208.135,114.409 209.822,114.409 210.936,113.295 P4.31@211.825,113.295 ; 184.466,111.087 cw(c184.695,111.087) U6.44@184.619,111.303 ; 210.266,113.965 ccw(c210.936,114.635) P4.31@211.46,113.845 ; 210.486,113.745 ccw(c211.111,114.371) P4.31@211.601,113.633 ; 210.706,113.525 ccw(c211.287,114.107) P4.31@211.741,113.422 ; 210.925,113.306 ccw(c211.462,113.843) P4.31@211.881,113.21
  Bottom Layer w0.254: v1(184.277,109.22) 184.277,101.233 184.004,100.96 184.004,74.06 188.214,69.85 v1(188.214,63.627)
"OV D5": P4.34 P8.13 U6.45 | length 131.3
  Top Layer w0.254: P8.13@139.7,59.829 cw(c139.7,58.325) 140.764,59.388 cw(c141.827,60.452) P8.13@140.323,60.452 ; P8.13@139.7,60.083 cw(c139.7,59.192) 140.33,59.822 cw(c140.96,60.452) P8.13@140.069,60.452 ; P8.13@139.7,60.452 140.777,59.375 145.857,59.375 146.88,60.398 175.568,60.398 v1(175.641,60.325) ; 175.289,60.398 cw(c175.289,59.973) v1@175.589,60.273 ; v1(181.864,111.379) 182.499,111.379 183.007,110.871 183.479,110.871 U6.45@184.812,112.203 ; U6.45@184.747,112.203 U6.45@184.812,112.203 ; P4.34@208.818,115.368 ccw(c207.691,114.24) 207.691,115.835 ccw(c207.691,117.429) P4.34@208.818,116.302 ; P4.34@208.998,115.547 ccw(c208.304,114.854) 208.304,115.835 ccw(c208.304,116.816) P4.34@208.998,116.122 ; P4.34@209.285,115.835 207.656,115.835 205.226,113.405 198.841,113.405 198.787,113.351 189.252,113.351 189.097,113.506 186.114,113.506 U6.45@184.812,112.203
  Bottom Layer w0.254: v1(175.641,60.325) 175.641,90.17 174.171,91.64 174.171,96.962 176.25,99.041 178.931,99.041 180.594,100.704 180.594,110.109 v1(181.864,111.379)
"OV D6": P5.35 P8.14 U6.96 | length 96.7
  Top Layer w0.254: P8.14@139.7,62.992 140.086,62.992 141.163,64.069 ; P8.14@139.716,63.106 ccw(c139.836,63.956) 140.443,63.349 ; P8.14@139.752,63.357 ccw(c139.925,64.587) 140.803,63.709 ; P8.14@139.787,63.609 ccw(c140.014,65.218) 141.163,64.069 ; P8.14@140.323,62.992 cw(c140.895,62.992) 140.491,63.397 ; P5.35@144.272,118.364 148.971,118.364 149.987,117.348 v1(153.162,117.348) 159.9,117.348 163.599,113.649 U6.96@163.599,113.618 ; P5.35@144.541,118.095 cw(c145.192,117.444) 145.192,118.364 cw(c145.192,119.284) P5.35@144.541,118.633 ; P5.35@144.721,117.915 cw(c145.805,116.831) 145.805,118.364 cw(c145.805,119.897) P5.35@144.721,118.813 ; v1(151.003,62.865) 146.43,62.865 145.226,64.069 141.163,64.069
  Bottom Layer w0.254: v1(151.003,62.865) 152.459,64.321 152.459,116.645 v1(153.162,117.348)
"OV D7": P5.34 P8.15 U6.97 | length 90.9
  Top Layer w0.254: P5.34@141.721,115.835 142.685,115.835 ; P8.15@142.24,60.452 143.257,60.452 ; P5.34@142.337,115.596 cw(c142.685,115.461) 142.685,115.835 ; P5.34@142.337,116.073 ccw(c142.685,116.208) 142.685,115.835 ; P8.15@142.795,60.169 cw(c143.257,59.934) 143.257,60.452 ; P8.15@142.795,60.735 ccw(c143.257,60.97) 143.257,60.452 ; v1(151.384,61.849) 144.654,61.849 143.257,60.452 ; U6.97@163.245,113.264 160.147,116.362 v1(154.051,116.362) 150.084,116.362 149.489,116.957 149.48,116.949 143.8,116.949 142.685,115.835
  Bottom Layer w0.254: v1(151.384,61.849) 152.913,63.378 152.913,78.625 154.051,79.763 v1(154.051,116.362)
"OV SCL": P5.19 P8.4 U6.117 | length 84
  Top Layer w0.254: v1@124.079,96.901 v1(124.088,96.91) 129.429,96.91 129.781,96.559 140.755,96.559 141.136,96.94 142.648,96.94 143.762,98.055 P5.19@144.261,98.055 147.077,98.055 150.63,101.608 160.782,101.608 U6.117@162.184,103.011 ; P5.19@144.549,97.767 cw(c145.242,97.074) 145.242,98.055 cw(c145.242,99.036) P5.19@144.549,98.342 ; P5.19@144.728,97.588 cw(c145.856,96.46) 145.856,98.055 cw(c145.856,99.649) P5.19@144.728,98.522
  Bottom Layer w0.254: v1(124.088,96.91) 124.088,77.082 123.873,76.866 123.873,67.643 127,64.516 P8.4@127,62.992 ; P8.4@126.559,63.433 ccw(c125.496,64.496) 127,64.496 ccw(c128.504,64.496) P8.4@127.441,63.433 ; P8.4@126.739,63.253 ccw(c126.109,63.883) 127,63.883 ccw(c127.891,63.883) P8.4@127.261,63.253
"OV SDA": P5.10 P8.6 U6.128 | length 89.4
  Top Layer w0.254: P5.10@141.721,85.355 143.107,86.741 145.005,86.741 149.777,91.513 158.465,91.513 U6.128@166.074,99.122 ; P5.10@141.721,85.761 ccw(c141.721,86.742) 142.415,86.049 ccw(c143.109,85.355) P5.10@142.128,85.355 ; P5.10@141.721,86.015 ccw(c141.721,87.61) 142.849,86.482 ccw(c143.976,85.355) P5.10@142.382,85.355
  Bottom Layer w0.254: P8.6@129.54,62.369 cw(c129.54,61.797) 129.945,62.201 ; P8.6@129.54,62.992 129.54,62.606 131.003,61.143 131.003,60.006 131.634,59.375 140.146,59.375 140.777,60.006 140.777,60.512 141.794,61.529 145.349,61.529 148.251,64.431 148.251,80.401 144.412,84.24 143.147,84.24 142.032,85.355 P5.10@141.721,85.355 ; P8.6@129.655,62.988 ccw(c130.768,62.953) 129.98,62.166 ; P8.6@129.909,62.98 ccw(c131.571,62.927) 130.395,61.751 ; P8.6@130.163,62.972 ccw(c132.375,62.901) 130.81,61.336 ; P5.10@141.727,85.203 cw(c141.766,84.193) 142.48,84.907 ; P5.10@141.737,84.949 cw(c141.796,83.401) 142.891,84.496 ; P5.10@142.382,85.355 ccw(c143.225,85.355) 142.629,84.759
"OV VSYNC": P5.31 P8.17 U6.100 | length 92
  Top Layer w0.254: P5.31@144.261,113.295 146.188,113.295 147.066,114.173 v1(155.448,114.173) 155.521,114.246 160.142,114.246 U6.100@162.184,112.204 ; P5.31@144.549,113.007 cw(c145.242,112.314) 145.242,113.295 cw(c145.242,114.276) P5.31@144.549,113.582 ; P5.31@144.728,112.828 cw(c145.856,111.7) 145.856,113.295 cw(c145.856,114.889) P5.31@144.728,113.762
  Bottom Layer w0.254: P8.17@144.78,60.452 145.161,60.833 152.4,60.833 153.416,61.849 153.416,71.882 156.967,75.433 156.967,78.862 155.448,80.381 v1(155.448,114.173) ; P8.17@144.861,60.371 cw(c145.977,59.255) 145.977,60.833 ; P8.17@145.041,60.191 cw(c146.591,58.641) 146.591,60.833 ; P8.17@145.221,60.011 cw(c147.204,58.028) 147.204,60.833
PA0: "KEY UP.2" P4.23 U6.34 | length 87.8
  Top Layer w0.254: U6.34@186.933,105.132 186.998,105.132 188.01,104.121 189.249,104.121 v1(190.119,103.251) ; v1(197.612,103.124) 207.046,103.124 208.171,104.249 210.069,104.249 210.523,103.795 211.165,103.795 P4.23@211.825,103.135 ; v1(216.535,74.168) 233.172,74.168 236.22,71.12 ; 235.56,71.12 ccw(c233.965,71.12) 235.093,72.247 ccw(c236.22,73.375) 236.22,71.78 ; 235.814,71.12 ccw(c234.832,71.12) 235.526,71.814 ccw(c236.22,72.508) 236.22,71.526
  Bottom Layer w0.254: v1(190.119,103.251) 197.485,103.251 v1(197.612,103.124) ; 197.129,103.251 cw(c197.129,102.641) v1@197.56,103.072 ; P4.23@211.825,102.474 cw(c211.825,101.631) 212.421,102.227 ; P4.23@211.825,103.135 211.825,102.824 213.848,100.801 213.848,78.506 216.535,75.819 v1(216.535,74.168) ; P4.23@211.978,103.135 ccw(c213.097,103.135) 212.305,102.343 ; P4.23@212.232,103.135 ccw(c213.964,103.135) 212.739,101.91 ; P4.23@212.486,103.135 ccw(c214.831,103.135) 213.173,101.476
PA1: P4.26 P14.2 U6.35 | length 132.3
  Top Layer w0.254: U6.35@187.287,105.486 187.352,105.486 188.263,104.575 191.45,104.575 192.741,105.866 209.094,105.866 P4.26@209.285,105.675 ; 207.23,105.866 cw(c207.23,103.62) P4.26@208.818,105.208 ; 207.843,105.866 cw(c207.843,104.233) P4.26@208.998,105.387 ; 208.152,105.866 ccw(c208.152,106.808) P4.26@208.818,106.142 ; 208.457,105.866 cw(c208.457,104.846) P4.26@209.177,105.567 ; v1(210.693,68.707) 213.306,71.32 233.16,71.32 235.382,69.098 251.15,69.098 254.628,72.575 260.165,72.575 261.119,71.621 264.661,71.621 P14.2@266.192,73.152
  Bottom Layer w0.254: P4.26@208.625,105.675 cw(c207.03,105.675) 208.158,104.547 cw(c209.285,103.42) P4.26@209.285,105.014 ; P4.26@208.879,105.675 cw(c207.898,105.675) 208.591,104.981 cw(c209.285,104.287) P4.26@209.285,105.268 ; P4.26@209.285,105.675 205.486,101.876 205.486,82.176 205.559,82.103 205.559,75.873 210.693,70.739 v1(210.693,68.707)
PA2: P4.25 P9.3 U6.36 | length 104.5
  Top Layer w0.254: U6.36@187.64,105.84 188.451,105.029 191.262,105.029 193.022,106.789 210.069,106.789 210.523,106.335 211.165,106.335 P4.25@211.825,105.675 211.933,105.675 214.736,102.871 214.736,102.122 216.622,100.236 218.567,100.236 219.677,101.346 221.1,101.346 222.062,100.384 222.63,100.384 223.095,100.849 224.276,100.849 226.314,102.887 226.314,103.378 v1(226.441,103.505) ; P4.25@211.825,105.014 cw(c211.825,103.161) 213.136,104.471 ; P4.25@211.825,105.268 cw(c211.825,104.028) 212.702,104.905 ; P4.25@212.232,105.675 ccw(c212.953,105.675) 212.443,105.164 ; P4.25@212.486,105.675 ccw(c213.821,105.675) 212.877,104.731 ; 226.314,103.022 cw(c226.924,103.022) v1@226.493,103.453
  Bottom Layer w0.254: P9.3@226.223,151.374 cw(c225.659,150.527) 226.676,150.527 ; P9.3@226.363,151.585 cw(c225.975,151.001) 226.676,151.001 ; v1@226.389,103.557 ccw(c226.004,103.942) 226.549,103.942 ; v1(226.441,103.505) 226.549,103.613 226.549,106.551 226.859,106.861 227.501,106.861 229.073,108.433 229.073,109.245 228.619,109.699 228.619,116.938 226.676,118.881 226.676,131.965 225.945,132.696 225.945,133.101 225.914,133.132 225.914,134.392 226.603,135.081 226.603,150.458 226.676,150.531 226.676,151.784 P9.3@226.568,151.892 ; 226.676,150.649 cw(c227.811,150.649) P9.3@227.009,151.451
PA3: P4.28 P9.4 U6.37 | length 117.8
  Top Layer w0.254: U6.37@187.64,109.375 187.734,109.375 191.798,109.375 192.532,110.109 199.847,110.109 199.866,110.09 203.83,110.09 203.849,110.108 205.853,110.108 206.115,109.847 207.41,109.847 209.042,108.215 P4.28@209.285,108.215 210.711,106.789 212.287,106.789 215.19,103.886 215.19,102.31 216.789,100.711 217.932,100.711 v1(218.059,100.838) ; U6.37@187.648,109.383 ccw(c187.667,109.402) U6.37@187.667,109.375 ; U6.37@187.828,109.562 ccw(c188.28,110.015) 188.28,109.375 ; U6.37@188.007,109.742 ccw(c188.893,110.628) 188.893,109.375 ; U6.37@188.187,109.922 ccw(c189.506,111.241) 189.506,109.375 ; 217.576,100.711 ccw(c217.576,101.321) v1@218.007,100.89 ; v1(218.694,95.377) 225.933,95.377 v1(226.06,95.504) ; 225.577,95.377 ccw(c225.577,95.987) v1@226.008,95.556
  Bottom Layer w0.254: v1(218.059,100.838) 218.059,96.012 v1(218.694,95.377) ; 225.684,153.162 ccw(c224.892,153.954) P9.4@225.969,154.261 ; 225.989,153.467 ccw(c225.367,154.089) P9.4@226.213,154.331 ; v1(226.06,95.504) 226.46,95.904 226.46,102.707 225.914,103.253 225.914,106.558 226.671,107.315 227.313,107.315 228.619,108.621 228.619,109.057 227.73,109.946 227.73,117.185 225.491,119.424 225.491,132.508 225.491,132.913 225.46,132.944 225.46,140.685 225.491,140.716 225.491,152.969 226.568,154.046 P9.4@226.568,154.432 ; 226.163,153.641 cw(c226.568,153.237) P9.4@226.568,153.809